# Altium PCB BAILEY.PcbDoc (part 8 of 8)
Units mil, origin at the board's own origin, x right, y up, seen from the top; angles counter-clockwise.
Board outline 4500 x 4000 mil, 4 copper layers (Signal Layer 1, Signal Layer 2, Signal Layer 3, Signal Layer 4), stack 59.904 mil thick; 190 components, 117 nets, 664 pads, 291 vias.
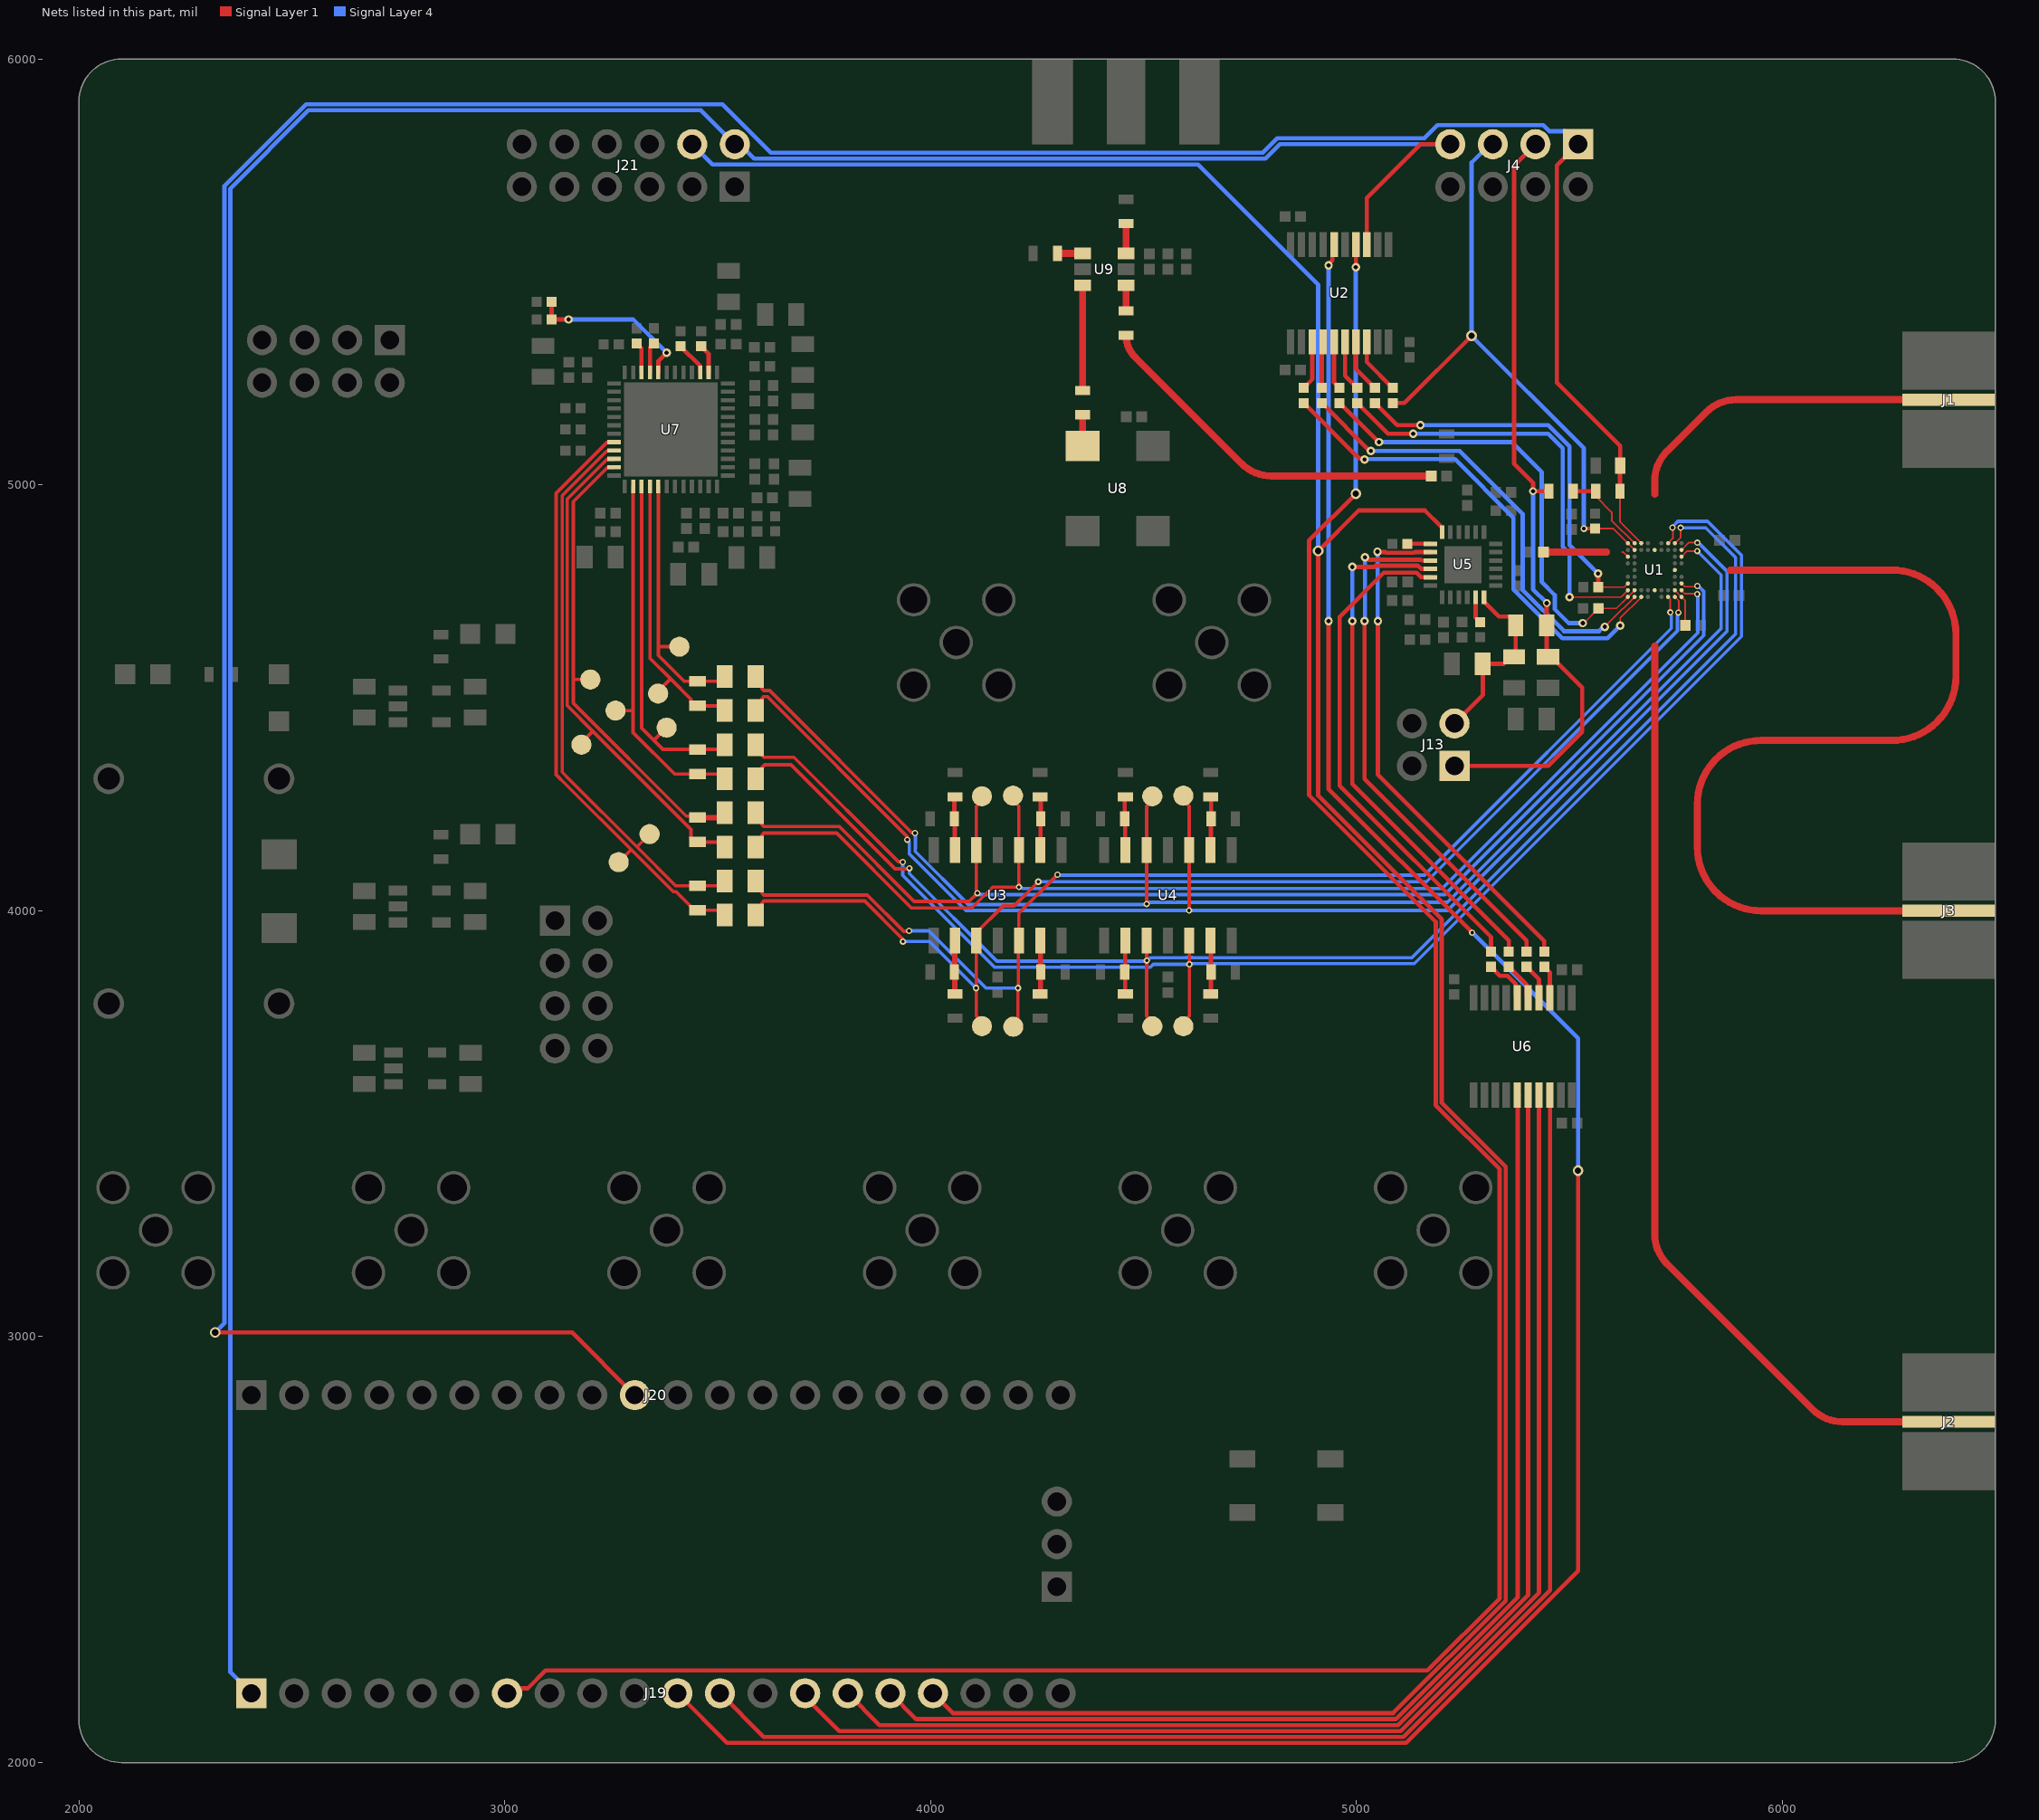
[diagram p5: the nets of this part, all layers, seen from the top]

## Via types
v1: diameter 25, hole 15, Signal Layer 1 to Signal Layer 4, 128 vias
v2: diameter 13.78, hole 7.87, Signal Layer 1 to Signal Layer 4, tented both sides, 41 vias
v3: diameter 20, hole 10, Signal Layer 1 to Signal Layer 4, 39 vias
v4: diameter 15, hole 8, Signal Layer 1 to Signal Layer 4, 27 vias
v5: diameter 16.14, hole 16.14, Signal Layer 1 to Signal Layer 4, 24 vias
v6: diameter 23.62, hole 13.78, Signal Layer 1 to Signal Layer 4, tented both sides, 16 vias
v7: diameter 16, hole 16, Signal Layer 1 to Signal Layer 4, 8 vias
v8: diameter 196.85, hole 125.98, Signal Layer 1 to Signal Layer 4, 4 vias
v9: diameter 18, hole 10, Signal Layer 1 to Signal Layer 4, 2 vias
v10: diameter 11, hole 6, Signal Layer 1 to Signal Layer 4, 1 vias
v11: diameter 16, hole 8, Signal Layer 1 to Signal Layer 4, 1 vias

## Nets (pads, with @x,y where several pads share a name; then routed paths per layer and width w, separated by ;. In a path a pad name is that pad's centre, name@x,y a point inside that pad or via, vN(x,y) a via of type N, cw(c..) or ccw(c..) an arc to the next point about the centre after c; other vN are vias at no path point) (continued)
NetR3_1: R3.1 R4.2 U1.A2 | length 207.7
  Signal Layer 1 w4: R4.2@5561.46,4973.11 5599.18,4935.39 5599.18,4916.57 U1.A2@5652.76,4862.99 ; R4.2@5561.46,4978.11 R4.2@5561.46,4985
  Signal Layer 1 w10: R3.1@5508.54,4985 R4.2@5561.46,4985
NetR5_1: R5.1 U2.3 | length 116.5
  Signal Layer 1 w10: R5.1@4876,5227.59 4896.02,5247.62 U2.3@4896.02,5335.83
NetR6_1: R6.1 U2.4 | length 109.6
  Signal Layer 1 w10: R6.1@4918.41,5227.59 4918.41,5332.62 U2.4@4921.61,5335.83
NetR7_1: R7.1 U2.5 | length 113.5
  Signal Layer 1 w10: U2.5@4947.2,5335.83 4947.2,5240.42 R7.1@4960.03,5227.59
NetR8_1: R8.1 U2.6 | length 120.2
  Signal Layer 1 w10: U2.6@4972.8,5335.83 4972.8,5256.45 R8.1@5001.65,5227.59
NetR9_1: R9.1 U2.7 | length 126.8
  Signal Layer 1 w10: U2.7@4998.39,5335.83 4998.39,5272.48 R9.1@5043.28,5227.59
NetR10_1: R10.1 U2.8 | length 133.5
  Signal Layer 1 w10: U2.8@5023.98,5335.83 5023.98,5288.51 R10.1@5084.9,5227.59
NetR12_1: R12.1 R14.1 U3.2 | length 126.4
  Signal Layer 1 w12.35: R14.1@4057.16,3804.66 4056.43,3805.39 4056.43,3855.39 R12.1@4055.7,3856.12 4056.43,3856.85 4056.43,3929.09 U3.2@4057.16,3929.82
NetR13_1: R13.1 R15.1 U3.13 | length 126.4
  Signal Layer 1 w10: U3.13@4057.16,4142.42 4056.43,4143.15 4056.43,4215.39 R13.1@4055.7,4216.12 4055.7,4266.12 R15.1@4057.16,4267.58
NetR16_1: R16.1 R18.1 U3.6 | length 126.4
  Signal Layer 1 w12.35: R16.1@4257.16,3804.66 4257.89,3805.39 4257.89,3855.39 R18.1@4258.61,3856.12 4257.89,3856.85 4257.89,3929.09 U3.6@4257.16,3929.82
NetR17_1: R17.1 R19.1 U3.9 | length 126.4
  Signal Layer 1 w10: U3.9@4257.16,4142.42 4257.89,4143.15 4257.89,4215.39 R19.1@4258.61,4216.12 4258.61,4266.12 R17.1@4257.16,4267.58
NetR20_1: R20.1 R22.1 U4.2 | length 126.4
  Signal Layer 1 w10: R22.1@4457.16,3804.66 4456.43,3805.39 4456.43,3855.39 R20.1@4455.7,3856.12 4456.43,3856.85 4456.43,3929.09 U4.2@4457.16,3929.82
NetR21_1: R21.1 R23.1 U4.13 | length 126.4
  Signal Layer 1 w10: U4.13@4457.16,4142.42 4456.43,4143.15 4456.43,4215.39 R21.1@4455.7,4216.12 4455.7,4266.12 R23.1@4457.16,4267.58
NetR24_1: R24.1 R26.1 U4.6 | length 126.4
  Signal Layer 1 w10: R24.1@4657.16,3804.66 4657.89,3805.39 4657.89,3855.39 R26.1@4658.61,3856.12 4657.89,3856.85 4657.89,3929.09 U4.6@4657.16,3929.82
NetR25_1: R25.1 R27.1 U4.9 | length 126.4
  Signal Layer 1 w10: U4.9@4657.16,4142.42 4657.89,4143.15 4657.89,4215.39 R27.1@4658.61,4216.12 4658.61,4266.12 R25.1@4657.16,4267.58
NetR28_1: R28.1 U5.13 | length 53.9
  Signal Layer 1 w10: R28.1@5119.43,4861.47 5119.58,4861.61 5173.08,4861.61 U5.13@5173.23,4861.76
NetR30_1: R30.1 U5.23 | length 62.4
  Signal Layer 1 w10: U5.23@5279.53,4735.78 5279.53,4688.19 R30.1@5290,4677.72
NetR33_1: R33.1 U6.3 | length 78
  Signal Layer 1 w10: R33.1@5440.66,3868.35 5453.98,3855.04 U6.3@5453.98,3795.85
NetR34_1: R34.1 U6.4 | length 84.7
  Signal Layer 1 w10: R34.1@5399.04,3868.35 5428.39,3839.01 U6.4@5428.39,3795.85
NetR35_1: R35.1 U6.5 | length 91.3
  Signal Layer 1 w10: R35.1@5357.42,3868.35 5398.94,3826.83 5398.94,3799.71 U6.5@5402.8,3795.85
NetR36_1: R36.1 U6.6 | length 108.3
  Signal Layer 1 w10: R36.1@5315.8,3868.35 5336.75,3847.4 5354.4,3847.4 5373.35,3828.46 5373.35,3799.71 U6.6@5377.2,3795.85
NetR38_1: R38.1 U7.26 | length 69.1
  Signal Layer 1 w10: R38.1@3461.14,5325.61 3478.58,5308.16 U7.26@3478.58,5263.76
NetR39_1: R39.1 U7.27 | length 81.1
  Signal Layer 1 w10: R39.1@3412.37,5325.61 3458.8,5279.18 3458.8,5263.85 U7.27@3458.9,5263.76
NetR40_1: R40.1 U7.34 | length 73.1
  Signal Layer 1 w10: R40.1@3310,5332.28 3321.1,5321.18 U7.34@3321.1,5263.76
NetR45_1: R45.1 R46.1 U7.32 | length 398.4
  Signal Layer 1 w10: R46.1@3110,5430 R45.1@3110,5388.38 v3(3150,5388.38) ; U7.32@3360.47,5263.76 3360.47,5290.47 v3(3380,5310)
  Signal Layer 4 w10: v3(3150,5388.38) 3301.62,5388.38 v3(3380,5310)
NetR47_2: R47.2 U7.33 | length 72.3
  Signal Layer 1 w10: U7.33@3340.79,5263.76 3340.79,5323.07 R47.2@3350,5332.28
NetR49_1: R49.1 U8.3 | length 73.1
  Signal Layer 1 w16.65: U8.3@4356.73,5091.47 R49.1@4356.73,5164.59
NetR49_2: R49.2 U9.3 | length 247.1
  Signal Layer 1 w16.65: R49.2@4356.73,5221.67 U9.3@4356.73,5468.74
NetR50_1: R50.1 U9.4 | length 120.4
  Signal Layer 1 w16.65: R50.1@4458.7,5408.54 U9.4@4458.7,5468.74 R50.1@4458.7,5408.54
NetR51_1: R51.1 U9.1 | length 118.4
  Signal Layer 1 w16.65: R51.1@4297.52,5543.54 U9.1@4356.73,5543.54 R51.1@4297.52,5543.54
NetR52_1: R52.1 U9.6 | length 139.8
  Signal Layer 1 w16.65: U9.6@4458.7,5543.54 R52.1@4458.7,5613.45 U9.6@4458.7,5543.54
PLL_CLK: J19.12 U6.18 | length 3297.4
  Signal Layer 1 w10: J19.12@3505.31,2162.69 3608,2060 5110,2060 5454.17,2404.17 5454.17,3567.23 U6.18@5453.93,3567.46
  Signal Layer 1 w15: U6.18@5453.93,3567.46 U6.18@5453.98,3567.51
PLL_CLK_3: R33.2 U5.14 | length 1227.5
  Signal Layer 1 w10: v3(5049.02,4843.21) 5050.15,4842.08 5067.04,4842.08 5068.46,4840.66 5134.97,4840.66 5136.39,4842.08 U5.14@5173.23,4842.08 ; v3(5050,4680) 5050,4320.11 5440.58,3929.53 5440.58,3903.87 R33.2@5440.66,3903.79
  Signal Layer 4 w10: v3(5049.02,4843.21) 5049.51,4842.71 5049.51,4680.49 v3(5050,4680)
PLL_CP_3: C25.1 J13.2 R31.2 R32.1 U5.24 | length 435.2
  Signal Layer 1 w10: J13.2@5230,4440 5296.42,4506.42 C25.1@5296.42,4580 5345.71,4580 5362.13,4596.42 R32.1@5370,4596.42 5373.58,4600 R31.2@5373.58,4670 5373.58,4677.87 5360.87,4690.59 5334.06,4690.59 5299.21,4725.44 U5.24@5299.21,4735.78
PLL_DATA: J19.14 U6.17 | length 3068.1
  Signal Layer 1 w10: J19.14@3705.31,2162.69 3705.31,2153.93 3785.23,2074 5103.51,2074 5428.39,2398.88 U6.17@5428.39,3567.51
PLL_DATA_3: R34.2 U5.15 | length 1240.4
  Signal Layer 1 w10: v3(5019.02,4679.98) 5019.02,4309.65 5398.91,3929.76 5398.91,3903.92 R34.2@5399.04,3903.79 ; v3(5020,4830) 5022.71,4830 5028.5,4824.21 5150.01,4824.21 5151.41,4822.8 5172.81,4822.8 U5.15@5173.23,4822.39
  Signal Layer 4 w10: v3(5019.02,4679.98) 5020,4680.96 v3(5020,4830)
PLL_LE: J19.15 U6.16 | length 2929.1
  Signal Layer 1 w10: J19.15@3805.31,2162.69 3880,2088 5097.71,2088 5403.03,2393.32 U6.16@5403.03,3567.27
PLL_LE_3: R35.2 U5.16 | length 1243.3
  Signal Layer 1 w10: v3(4990,4680) 4990,4297.54 5357.63,3929.91 5357.63,3904 R35.2@5357.42,3903.79 ; v3(4990.32,4807.34) 5041.55,4807.34 5044.42,4810.21 5144.21,4810.21 5151.3,4803.12 5172.81,4803.12 U5.16@5173.23,4802.71
  Signal Layer 4 w10: v3(4990,4680) 4990.32,4680.32 v3(4990.32,4807.34)
PLL_MUXOUT: J19.16 U6.15 | length 2796.5
  Signal Layer 1 w10: J19.16@3905.31,2162.69 3966,2102 5091.91,2102 5378.56,2388.65 U6.15@5378.56,3566.15
  Signal Layer 1 w15: U6.15@5377.2,3567.51 U6.15@5378.56,3566.15
PLL_MUXOUT_3: R36.2 U5.17 | length 1194.6
  Signal Layer 1 w10: U5.17@5173.23,4783.02 5172.81,4783.43 5151.18,4783.43 5140.61,4794.01 5063.88,4794.01 4960,4690.13 4960,4293.92 5315.83,3938.09 R36.2@5315.8,3903.79
PLL_REFIN: C14.2 R50.2 | length 863.8
  Signal Layer 1 w16.65: R50.2@4458.7,5351.46 ccw(c4531.51,5351.46) 4480.03,5299.97 4729.89,5050.11 ccw(c4800.6,5120.82) 4800.6,5020.82 C14.2@5175.31,5020.82
PLL_TXDATA: J19.17 J21.8 U5.12 | length 6709.6
  Signal Layer 1 w10: J19.17@4005.31,2162.69 4052,2116 5086.11,2116 5350,2379.89 5350,3398.97 5200,3548.97 5200,3980 4910,4270 v1(4910,4844.85) 5005.15,4940 5160.44,4940 5200.79,4899.66 U5.12@5200.79,4889.32
  Signal Layer 4 w10: J21.8@3440,5800 3488,5752 4628,5752 4910,5470 v1(4910,4844.85)
RADAR_BG_1: C4.2 U1.H8 U1.J9 | length 93
  Signal Layer 1 w4: U1.H8@5747.24,4752.76 U1.J9@5762.99,4737.01 5771.89,4728.11 C4.2@5771.89,4670
RADAR_IF1I_4_N: C59.1 C60.2 TP10.1 U7.45 | length 1353.9
  Signal Layer 1 w8: U7.45@3256.24,5080.79 3255.34,5079.88 3239.88,5079.88 3134.78,4974.78 3134.78,4325.22 3151.52,4308.48 3310.08,4149.92 ; TP10.1@3340,4180 3310.08,4150.08 3310.08,4149.92 ; C60.2@3516.25,4070 3505,4058.74 C59.1@3452.67,4058.74 3401.26,4058.74 3310.08,4149.92
RADAR_IF1I_4_P: C58.2 C59.2 TP9.1 U7.44 | length 1419.8
  Signal Layer 1 w8: U7.44@3256.24,5100.47 3255.34,5099.57 3239.57,5099.57 3124.64,4984.64 3124.64,4984.43 3120.78,4980.58 3120.78,4319.42 3145.72,4294.48 3296.63,4143.57 ; TP9.1@3267.4,4114.23 3296.63,4143.46 3296.63,4143.57 ; C58.2@3516.25,3990 3504.99,4001.26 C59.2@3452.67,4001.26 3445.59,4001.26 3402.11,4044.74 3395.46,4044.74 3296.63,4143.57
RADAR_IF1I_N: C60.1 TP2.1 U1.J7 U3.5 | length 2888.4
  Signal Layer 1 w4: U1.J7@5731.5,4737.01 5731.5,4736.71 5736.46,4731.74 5736.46,4700.81 v4(5736.77,4700.51)
  Signal Layer 1 w8: C60.1@3589.09,4070 3589.09,4062.13 3603.79,4047.43 3603.79,4041.69 3608.48,4037 3850.9,4037 3936.28,3951.62 3947.86,3951.62 v4(3949.16,3952.92) ; TP2.1@4193.95,3727.77 4193.95,3738.39 4205.08,3749.52 4205.08,3815.32 4206.12,3816.37 4206.12,3928.78 U3.5@4207.16,3929.82 4207.16,3994.06 v4(4297.94,4084.84)
  Signal Layer 4 w8: v4(3949.16,3952.92) 3995.6,3952.92 4129.96,3818.56 v4(4205.08,3818.56) ; v4(4297.94,4084.84) 4299.28,4083.5 5159.66,4083.5 5739.27,4663.1 5739.27,4693.06 5738.11,4694.22 5738.11,4699.17 v4(5736.77,4700.51)
RADAR_IF1I_P: C58.1 TP1.1 U1.J8 U3.3 | length 2876.7
  Signal Layer 1 w4: U1.J8@5747.24,4737.01 5756.63,4727.62 5756.63,4701.17 v4(5755.77,4700.31)
  Signal Layer 1 w8: C58.1@3589.09,3990 3589.09,3997.87 3603.79,4012.57 3603.79,4018.31 3608.48,4023 3845.11,4023 3930.49,3937.62 3930.59,3937.62 3933.57,3934.64 3933.57,3929.16 v4(3934.91,3927.82) ; TP1.1@4120.37,3729.07 4120.37,3739.69 4107.16,3752.9 U3.3@4107.16,3929.82 4107.16,3948.52 4170.23,4011.6 4196.07,4011.6 v4(4252.67,4068.2)
  Signal Layer 4 w8: v4(3934.91,3927.82) 3997.4,3927.82 v4(4106.67,3818.56) ; v4(4252.67,4068.2) 5164.16,4068.2 5753.27,4657.31 5753.27,4692.86 5754.43,4694.02 5754.43,4698.97 v4(5755.77,4700.31)
RADAR_IF1Q_4_N: C62.1 C63.2 TP12.1 U7.47 | length 1113.5
  Signal Layer 1 w8: 3160.93,4542.99 TP12.1@3201,4542.99 ; U7.47@3256.24,5041.42 3255.34,5040.51 3240.51,5040.51 3160.78,4960.78 3160.78,4800.57 3160.92,4800.43 3160.92,4542.98 3160.92,4487.68 3426.21,4222.4 3449.02,4222.4 C62.1@3452.67,4218.74
  Signal Layer 1 w12.35: C62.1@3452.67,4218.74 3505,4218.74 C63.2@3516.25,4230
RADAR_IF1Q_4_P: C61.2 C62.2 TP11.1 U7.46 | length 1196
  Signal Layer 1 w8: TP11.1@3180,4390 3180,4394.83 3206.89,4421.72 ; U7.46@3256.24,5061.1 3255.34,5060.2 3240.2,5060.2 3146.78,4966.78 3146.78,4481.82 3206.89,4421.72 ; C61.2@3516.25,4150 3504.99,4161.26 C62.2@3452.67,4161.26 3445.59,4161.26 3437.38,4169.46 3437.38,4191.22 3206.89,4421.72
RADAR_IF1Q_N: C63.1 TP4.1 U1.G9 U3.12 | length 2980.2
  Signal Layer 1 w4: U1.G9@5763.11,4768.38 5770.63,4760.87 5798.25,4760.87 v4(5799.94,4762.55)
  Signal Layer 1 w8: C63.1@3589.09,4230 3603.79,4215.3 3603.79,4202.44 3608.48,4197.75 3785.44,4197.75 3961.26,4021.92 4090.15,4021.92 4109.58,4041.35 v4(4109.58,4041.5) ; U3.12@4107.16,4142.42 4107.16,4245.01 4120.37,4258.23 TP4.1@4120.37,4268.84 ; U3.12@4107.16,4142.42 4107.18,4045.79 4109.65,4043.32 v4@4109.65,4041.5
  Signal Layer 4 w8: v4(4109.58,4041.5) 4111.47,4041.5 4114.97,4038 4196.03,4038 5207.09,4038 5815.23,4646.14 5815.23,4749.98 5806.15,4759.06 5805.33,4759.06 5801.83,4762.55 v4(5799.94,4762.55)
RADAR_IF1Q_P: C61.1 TP3.1 U1.H9 U3.10 | length 2928.7
  Signal Layer 1 w4: U1.H9@5762.99,4752.76 5771.3,4744.45 5798.84,4744.45 v4(5799.73,4743.56)
  Signal Layer 1 w8: C61.1@3589.09,4150 3603.79,4164.7 3603.79,4177.56 3608.48,4182.25 3779.02,4182.25 3954.84,4006.42 4096.42,4006.42 4145.28,4055.28 4206.75,4055.28 v4(4207.13,4055.65) ; TP3.1@4193.36,4270.26 4193.36,4259.64 4207.16,4245.84 U3.10@4207.16,4142.42 4207.11,4142.38 v4(4207.13,4055.65)
  Signal Layer 4 w8: v4(4207.13,4055.65) 4208.46,4054.31 4213.41,4054.31 4215.31,4052.42 5201.12,4052.42 5801.23,4652.53 5801.23,4737.11 5801.07,4737.27 5801.07,4742.22 v4(5799.73,4743.56)
RADAR_IF2I_4_N: C65.1 C66.2 TP14.1 U7.3 | length 830.4
  Signal Layer 1 w8: U7.3@3321.1,4996.24 3321.1,4428.9 3349.87,4400.13 ; TP14.1@3380,4430 3350.13,4400.13 3349.87,4400.13 ; C66.2@3516.25,4390 3504.99,4378.74 C65.1@3452.67,4378.74 3371.26,4378.74 3349.87,4400.13
RADAR_IF2I_4_P: C64.2 C65.2 TP13.1 U7.2 | length 879
  Signal Layer 1 w8: TP13.1@3260,4470 3301.24,4470 3301.42,4469.83 ; U7.2@3301.42,4996.24 3301.42,4469.83 ; C64.2@3516.25,4310 3504.99,4321.26 C65.2@3452.67,4321.26 3398.74,4321.26 3301.42,4418.58 3301.42,4469.83
RADAR_IF2I_N: C66.1 TP6.1 U1.A7 U4.5 | length 3518
  Signal Layer 1 w4: U1.A7@5731.5,4862.99 5742.72,4874.22 5742.72,4898.92 v4(5741.97,4899.67)
  Signal Layer 1 w8: C66.1@3589.09,4390 3603.79,4375.3 3603.79,4365.29 3608.48,4360.6 3679.03,4360.6 3924.13,4115.5 3932.82,4115.5 v4(3934.16,4114.16) ; TP6.1@4593.36,3728.85 4593.36,3739.04 4607.48,3753.16 v4(4607.48,3874.5) ; v4@4606.91,3875.07 4607.48,3875.65 4607.32,3875.81 4607.32,3929.66 U4.5@4607.16,3929.82
  Signal Layer 4 w8: v4(3934.16,4114.16) 3934.16,4083.22 4141.56,3875.83 4149.76,3867.62 4516.02,3867.62 4522.9,3874.5 v4(4607.48,3874.5) ; v4@4607.48,3875.65 4607.66,3875.82 5135.62,3875.82 5903.86,4644.06 5903.86,4835 5824.16,4914.7 5754.58,4914.7 5745.5,4905.62 5745.5,4905.09 5741.97,4901.57 v4(5741.97,4899.67)
RADAR_IF2I_P: C64.1 TP5.1 U1.A8 U4.3 | length 3425
  Signal Layer 1 w4: U1.A8@5747.41,4863.16 5761,4876.74 v4(5761,4899.2)
  Signal Layer 1 w8: C64.1@3589.09,4310 3589.09,4317.87 3603.79,4332.57 3603.79,4336.51 3610.28,4343 3671.74,4343 3916.08,4098.66 3948.66,4098.66 v4(3950,4100) ; U4.3@4507.16,3929.82 4507.28,3929.7 v4@4507.28,3883.12 ; v4(4507.41,3883.12) 4507.01,3882.73 4507.01,3752.83 4520.37,3739.47 TP5.1@4520.37,3728.85
  Signal Layer 4 w8: v4(3950,4100) 3950,4087.19 4155.56,3881.62 4500.96,3881.62 4501.12,3881.79 4506.07,3881.79 v4(4507.41,3883.12) 4509.12,3883.12 4515.64,3889.65 4599.99,3889.65 4600.34,3890 4613.9,3890 4614.08,3889.82 5129.82,3889.82 5889.86,4649.86 5889.86,4829.21 5819.86,4899.2 v4(5761,4899.2)
RADAR_IF2Q_4_N: C68.1 C69.2 TP16.1 U7.5 | length 632.2
  Signal Layer 1 w8: U7.5@3360.47,4996.24 3360.47,4620.78 ; TP16.1@3410,4620 3361.26,4620 3360.47,4620.78 ; C69.2@3516.25,4550 3505,4538.74 C68.1@3452.67,4538.74 3421.26,4538.74 3360.47,4599.53 3360.47,4620.78
RADAR_IF2Q_4_P: C67.2 C68.2 TP15.1 U7.4 | length 680.6
  Signal Layer 1 w8: U7.4@3340.79,4996.24 3340.79,4593.14 3389.08,4544.85 ; TP15.1@3360,4510 3360,4515.76 3389.08,4544.85 ; C67.2@3516.25,4470 3504.99,4481.26 C68.2@3452.67,4481.26 3445.59,4481.26 3437.38,4489.46 3437.38,4496.55 3389.08,4544.85
RADAR_IF2Q_N: C69.1 TP8.1 U1.C9 U4.12 | length 3296.2
  Signal Layer 1 w4: U1.C9@5762.99,4831.5 5776.23,4844.73 v4(5799.86,4844.73)
  Signal Layer 1 w8: C69.1@3589.09,4550 3603.79,4535.3 3603.79,4521.69 3608.48,4517 3621.83,4517 3955.07,4183.76 3961.95,4183.76 v4(3963.29,4182.42) ; v4(4506.86,4016.08) 4507.01,4016.23 4507.01,4142.27 U4.12@4507.16,4142.42 4507.16,4245.01 4520.37,4258.23 TP8.1@4520.37,4268.84
  Signal Layer 4 w8: v4(3963.29,4182.42) 3964.05,4181.66 3964.05,4146.29 3963.76,4145.99 3963.76,4139.37 4088.54,4014.58 4500.41,4014.58 4500.57,4014.74 4505.52,4014.74 v4(4506.86,4016.08) 4508.76,4016.08 4512.73,4020.05 5213.23,4020.05 5856,4662.83 5856,4788.59 v4(5799.86,4844.73)
RADAR_IF2Q_P: C67.1 TP7.1 U1.B9 U4.10 | length 3360.9
  Signal Layer 1 w4: U1.B9@5762.99,4847.24 5779.97,4864.22 v4(5800.17,4864.22)
  Signal Layer 1 w8: C67.1@3589.09,4470 3603.79,4484.7 3603.79,4498.31 3608.48,4503 3616.03,4503 3943.91,4175.12 3943.91,4168.24 v4(3945.25,4166.91) ; TP7.1@4593.36,4270.26 4593.36,4259.64 4607.16,4245.84 U4.10@4607.16,4142.42 4606.87,4142.14 4606.87,4000.87 v4(4606.59,4000.58)
  Signal Layer 4 w8: v4(3945.25,4166.91) 3945.25,4165.01 3950.05,4160.21 3950.05,4152.09 3949.76,4151.79 3949.76,4133.57 4082.74,4000.58 v4(4606.59,4000.58) 5213.55,4000.58 5870,4657.03 5870,4796.51 5806.28,4860.23 5806.05,4860.23 5802.06,4864.22 v4(5800.17,4864.22)
RADAR_LO_DIV: C17.2 U1.C1 | length 165.3
  Signal Layer 1 w4.02: 5623.97,4842.07 5626.43,4842.07 5636.74,4831.77 U1.C1@5637.01,4831.77
  Signal Layer 1 w16.65: C17.2@5439.04,4842.07 5587.04,4842.07
RADAR_RX1_1: J2.1 U1.H5 | length 2269.9
  Signal Layer 1 w16.65: 5700,4621.9 5700,3241.43 ccw(c5800,3241.43) 5729.29,3170.71 6070.71,2829.29 ccw(c6141.42,2900) 6141.42,2800 J2.1@6390.94,2800
RADAR_RX2_1: J3.1 U1.E8 | length 2269.9
  Signal Layer 1 w16.65: 5878.1,4800 6257.3,4800 cw(c6257.3,4650) 6407.3,4650 6407.3,4550 cw(c6257.3,4550) 6257.3,4400 5950,4400 ccw(c5950,4250) 5800,4250 5800,4150 ccw(c5950,4150) 5950,4000 J3.1@6390.94,4000
RADAR_SPI_CLK_1: R6.2 U1.J2 | length 1094.6
  Signal Layer 1 w4: v3(5582.63,4666.77) 5597.74,4681.88 5597.74,4682 U1.J2@5652.76,4737.01
  Signal Layer 1 w10: R6.2@4918.41,5192.16 5030.7,5079.87 v3(5033.31,5079.87)
  Signal Layer 4 w10: v3(5033.31,5079.87) 5033.44,5080 5242.23,5080 5390,4932.23 5390,4753.25 5486.82,4656.44 5569.59,4656.44 5579.92,4666.77 v3(5582.63,4666.77)
RADAR_SPI_CS: J19.7 U2.14 | length 5832.6
  Signal Layer 1 w10: J19.7@3005.31,2162.69 3016.95,2174.34 3054.12,2174.34 3095.78,2216.01 5166.32,2216.01 5336,2385.69 5336,3393.17 5186,3543.17 5186,3974.2 4888.5,4271.7 4888.5,4869.34 v1(4998.35,4979.19) ; v3(4998.13,5510.81) 4998.26,5510.95 4998.26,5564.04 U2.14@4998.39,5564.17
  Signal Layer 4 w10: v3(4998.13,5510.81) 4998.13,4979.42 v1(4998.35,4979.19)
RADAR_SPI_CS_1: R1.1 R9.2 U1.G1 | length 929.9
  Signal Layer 1 w4: R1.1@5567.72,4760 5628.5,4760 U1.G1@5637.01,4768.5
  Signal Layer 1 w10: R9.2@5043.28,5192.16 5095.43,5140 v3(5150,5140) ; v3(5567.1,4791.57) 5567.41,4791.27 5567.41,4760.31 R1.1@5567.72,4760
  Signal Layer 4 w10: v3(5150,5140) 5450,5140 5500,5090 5500,4858.68 v3(5567.1,4791.57)
RADAR_SPI_MISO_1: R8.2 U1.H1 | length 1026.1
  Signal Layer 1 w4: v3(5500,4736.63) 5620.88,4736.63 U1.H1@5637.01,4752.76
  Signal Layer 1 w10: R8.2@5001.65,5192.16 5074.01,5119.8 v3(5133.02,5119.8)
  Signal Layer 4 w10: v3(5133.02,5119.8) 5450.4,5119.8 5483.94,5086.26 5483.94,4854.93 5500,4838.88 v3(5500,4736.63)
RADAR_SPI_MOSI_1: R5.2 U1.J3 | length 1171.1
  Signal Layer 1 w4: v3(5619.07,4669.79) 5619.07,4687.57 U1.J3@5668.5,4737.01
  Signal Layer 1 w10: R5.2@4876,5192.16 4992.43,5075.73 5006.75,5061.4 5016.71,5061.4 v3(5018.62,5059.49)
  Signal Layer 4 w10: v3(5018.62,5059.49) 5019.59,5060.46 5231.03,5060.46 5368.54,4922.95 5368.54,4754.91 5483.46,4640 5589.28,4640 v3(5619.07,4669.79)
RADAR_SPI_RST_1_N: C5.2 R7.2 U1.H2 U1.J1 | length 1109.5
  Signal Layer 1 w4: v3(5531.21,4675.44) 5533.55,4675.44 C5.2@5568.11,4710 5610,4710 U1.J1@5637.01,4737.01 U1.H2@5652.76,4752.76
  Signal Layer 1 w10: R7.2@4960.03,5192.16 5051.71,5100.48 v3(5052.74,5100.48)
  Signal Layer 4 w10: v3(5052.74,5100.48) 5364.38,5100.48 5434.84,5030.02 5434.84,4771.81 5465.49,4741.15 5465.49,4708.01 5498.07,4675.44 v3(5531.21,4675.44)
RADAR_SPI_RST_N: J19.11 U2.16 | length 5692.6
  Signal Layer 1 w10: J19.11@3405.31,2162.69 3522,2046 5116,2046 5520,2450 v1(5520,3390) ; v3(4934.16,4680.32) 4934.16,4286.06 v4(5271.46,3948.76) ; v3(4934.16,5515.27) 4934.16,5517.98 4943.35,5527.16 4943.35,5560.31 U2.16@4947.2,5564.17
  Signal Layer 4 w10: v3(4934.16,4680.32) v3(4934.16,5515.27) ; v4(5271.46,3948.76) 5520,3700.22 v1(5520,3390)
RADAR_TX1_1: J1.1 U1.B5 | length 816.4
  Signal Layer 1 w16.65: 5700,4978.1 5700,5008.57 cw(c5800,5008.57) 5729.29,5079.29 5820.71,5170.71 cw(c5891.42,5100) 5891.42,5200 J1.1@6390.94,5200
RADAR_TX1_EN: J4.4 J19.1 J21.7 U2.13 | length 6913.3
  Signal Layer 1 w10: U2.13@5023.98,5564.17 5023.98,5673.98 5150,5800 J4.4@5220,5800
  Signal Layer 4 w10: J19.1@2405.31,2162.69 2355.63,2212.37 2355.63,5695.83 2539.29,5879.49 2634.81,5879.49 3460.51,5879.49 J21.7@3540,5800 3551.32,5800 3585.32,5766 4786,5766 4820,5800 J4.4@5220,5800
RADAR_TX1_EN_1: J4.3 R2.2 R10.2 U1.A1 U1.B2 | length 1427.1
  Signal Layer 1 w4: R2.2@5560,4897.28 5602.72,4897.28 U1.A1@5637.01,4862.99 U1.B2@5652.76,4847.24
  Signal Layer 1 w8: v11(5533.59,4897.28) R2.2@5560,4897.28
  Signal Layer 1 w10: R10.2@5084.9,5192.16 5112.16,5192.16 v1(5270,5350)
  Signal Layer 4 w10: J4.3@5320,5800 5312.99,5800 5270,5757.01 v1(5270,5350) 5533.59,5086.41 v11(5533.59,4897.28)
RADAR_VPTAT: C6.2 J4.1 J20.10 R4.1 U1.A3 | length 8136.8
  Signal Layer 1 w4: R4.1@5618.64,4985 5618.54,4984.9 5618.54,4912.95 U1.A3@5668.5,4862.99
  Signal Layer 1 w10: v1(2320,3010) 3158,3010 J20.10@3305.31,2862.69 ; J4.1@5520,5800 5470.2,5750.2 5470.2,5239.8 5618.74,5091.26 C6.2@5618.74,5045 5618.64,5044.9 R4.1@5618.64,4985
  Signal Layer 4 w10: v1(2320,3010) 2341.63,3031.63 2341.63,5701.63 2533.49,5893.49 3511.37,5893.49 3624.86,5780 4780,5780 4814,5814 5159.47,5814 5189.9,5844.43 5438.4,5844.43 5452.4,5830.43 5489.57,5830.43 J4.1@5520,5800
RADAR_VTUNE: C26.1 J4.2 J13.1 R3.2 R31.1 | length 1841.9
  Signal Layer 1 w10: J13.1@5230,4340 5450,4340 5530,4420 5530,4524.29 5457.87,4596.42 C26.1@5450,4596.42 5446.42,4600 v9(5446.42,4722.29) ; J4.2@5420,5800 5370,5750 5370,5049.27 5414.3,5004.97 v9(5414.3,4985) R3.2@5451.46,4985
  Signal Layer 4 w10: v9(5414.3,4985) 5414.3,4754.41 v9(5446.42,4722.29)
pads on no net: J19.2 J19.19 J19.20 J20.1 J20.2 J20.4 J20.5 J20.6 J20.7 J20.9 J20.12 J20.14 J20.15 J20.20 J22.1 J22.3 U1.B7 U1.E2 U2.1 U2.9 U2.12 U2.20 U5.20 U5.21 U6.1 U6.7 U6.8 U6.9 U6.12 U6.13 U6.14 U6.20 U7.6 U7.7 U7.17 U7.28 U7.29 U7.30 U7.31 U10.4 U11.4 U12.4

## Polygon pours and split planes (outlines as drawn)
NetD1_1 on Signal Layer 1 "NETD1_1_L01_P002" (solid, pour order 2): 2000,4488.32 2550,4488.32 2550,4050 2000,4050
5V_IN on Signal Layer 1 "5V_IN_L01_P003" (solid, pour order 3): 2580,4700 2690.47,4700 2690.47,3530 2580,3530
5V_IN on Signal Layer 1 "5V_IN_L01_P004" (solid, pour order 4): 2333.84,4700 2580,4700 2580,4511.5 2333.84,4511.5
GND on Signal Layer 1 "GND_L01_P005" (solid, pour order 5): 2632.6,3641.81 2957.4,3641.81 2957.4,3530 2632.6,3530
5V_IN on Signal Layer 1 "5V_IN_L01_P006" (solid, pour order 6): 2632.6,3750.03 2790,3750.03 2790,3647.68 2632.6,3647.68
GND on Signal Layer 1 "GND_L01_P008" (solid, pour order 8): 2642.6,4021.81 2967.4,4021.81 2967.4,3910 2642.6,3910
GND on Signal Layer 1 "GND_L01_P011" (solid, pour order 11): 2642.6,4491.81 2967.4,4491.81 2967.4,4380 2642.6,4380
5V_IN on Signal Layer 1 "5V_IN_L01_P012" (solid, pour order 12): 2642.6,4700 2800,4700 2800,4497.68 2642.6,4497.68
3V3 on Signal Layer 1 "3V3_L01_P013" (solid, pour order 13): 2819.68,4600.06 2967.4,4600.06 2967.4,4497.72 2819.68,4497.72
1V5 on Signal Layer 1 "1V5_L01_P007" (solid, pour order 7): 2809.68,3750.06 2957.4,3750.06 2957.4,3647.72 2809.68,3647.72
5V_IN on Signal Layer 1 "5V_IN_L01_P009" (solid, pour order 9): 2642.6,4130.03 2800,4130.03 2800,4027.68 2642.6,4027.68
1V8 on Signal Layer 1 "1V8_L01_P010" (solid, pour order 10): 2819.68,4130.06 2967.4,4130.06 2967.4,4027.72 2819.68,4027.72
1V8 on Signal Layer 3 "1V8_L03_P033" (solid, pour order 33): 3190,3758.15 3800,3758.15 3800,3500 3190,3500
1V8 on Signal Layer 3 "1V8_L03_P031" (solid, pour order 31): 2000,4150 3800,4150 3800,3758.15 2000,3758.15
1V5 on Signal Layer 3 "1V5_L03_P001" (solid, pour order 1): 5500,6000 6500,6000 6500,4650 5500,4650
3V3 on Signal Layer 3 "3V3_L03_P017" (solid, pour order 17): 3850,5450 5450,5450 5450,6000 3850,6000
3V3 on Signal Layer 3 "3V3_L03_P019" (solid, pour order 19): 3850,5150 4700,5150 4700,5450 3850,5450
1V5 on Signal Layer 3 "1V5_L03_P016" (solid, pour order 16): 4750,5200 5500,5200 5500,5400 4750,5400
3V3 on Signal Layer 3 "3V3_L03_P022" (solid, pour order 22): 5189.45,4050 5483.94,4050 5483.94,5179.34 5189.45,5179.34
1V8 on Signal Layer 3 "1V8_L03_P023" (solid, pour order 23): 5529.76,3700 5177.8,3700 5177.8,4000 5529.76,4000
3V3 on Signal Layer 3 "3V3_L03_P024" (solid, pour order 24): 5200,3050 5950,3050 5950,3650 5200,3650
1V5 on Signal Layer 3 "1V5_L03_P025" (solid, pour order 25): 2000,3021.49 6500,3021.49 6500,2000 2000,2000
3V3 on Signal Layer 3 "3V3_L03_P026" (solid, pour order 26): 5483.94,4050 5950,4050 5950,4600 5483.94,4600
3V3 on Signal Layer 3 "3V3_L03_P027" (solid, pour order 27): 5583.94,3650 5950,3650 5950,4050 5583.94,4050
1V5 on Signal Layer 3 "1V5_L03_P028" (solid, pour order 28): 6000,4650 6500,4650 6500,2000 6000,2000
3V3 on Signal Layer 3 "3V3_L03_P030" (solid, pour order 30): 4850,4940.97 5189.45,4940.97 5189.45,5179.34 4850,5179.34
1V8 on Signal Layer 3 "1V8_L03_P032" (solid, pour order 32): 3190,3500 5177.8,3500 5177.8,3050 3190,3050
3V3 on Signal Layer 3 "3V3_L03_P020" (solid, pour order 20): 2000,4200 3850,4200 3850,6000 2000,6000
1V8 on Signal Layer 3 "1V8_L03_P021" (solid, pour order 21): 4900,3500 5177.8,3500 5177.8,4925.07 4900,4925.07
3V3 on Signal Layer 3 "3V3_L03_P018" (solid, pour order 18): 3850,3550 4850,3550 4850,5179.08 3850,5179.08
1V5 on Signal Layer 3 "1V5_L03_P029" (solid, pour order 29): 2000,3750 3165.38,3750 3165.38,3021.49 2000,3021.49
GND on Signal Layer 4 "GND_L04_P000" (solid, pour order 0): 2000,6000 6500,6000 6500,2000 2000,2000
GND on Signal Layer 2 "GND_L02_P015" (solid, pour order 15): 2000,6000 6500,6000 6500,2000 2000,2000

## Other copper
Signal Layer 1:
  region net ADC_MCLKIN: 3539.8,5085.69 3539.8,5075.88 3565.82,5072.46 3565.82,5089.11
  region net NetC15_1: 5254.43,4905.06 5265.25,4905.06 5268.17,4931.09 5251.52,4931.09
  region net RADAR_LO_DIV: 5587.46,4850.4 5587.46,4833.75 5625.49,4840.16 5625.49,4843.98
  region net NetC17_1: 5342.52,4847.49 5342.52,4836.66 5368.54,4833.75 5368.54,4850.4
  region net RADAR_RX2_1: 5878.1,4793.9 5878.1,4806.1 5805.1,4806.1 5805.1,4793.9
  region net RADAR_RX1_1: 5689.8,4693.66 5689.8,4696.36 5696.06,4722.3 5703.93,4722.3 5710.19,4696.36 5710.19,4693.66
  region net RADAR_TX1_1: 5706.1,4978.1 5693.89,4978.1 5693.89,4905.1 5706.1,4905.1
  region net RADAR_TX1_1: 5710.19,4906.34 5710.19,4903.64 5703.93,4877.7 5696.06,4877.7 5689.8,4903.64 5689.8,4906.34
  region net RADAR_TX1_1: 5696.06,4879.1 5703.93,4879.1 5703.93,4849.99 5696.06,4849.99
  region net RADAR_RX2_1: 5806.34,4789.8 5803.63,4789.8 5777.7,4796.06 5777.7,4803.94 5803.63,4810.2 5806.34,4810.2
  region net RADAR_RX1_1: 5693.89,4621.9 5706.1,4621.9 5706.1,4694.9 5693.89,4694.9
  region net RADAR_RX2_1: 5779.1,4803.94 5779.1,4796.06 5749.99,4796.06 5749.99,4803.94
  region net RADAR_RX1_1: 5703.93,4720.9 5696.06,4720.9 5696.06,4750.01 5703.93,4750.01

## Silkscreen, mask and mechanical layers (free items; w line width, h text height)
Top Overlay:
  drawing of 48 lines, arcs and shapes, not listed
  text "TX1_EN" at 5215,5953.33 h25
  text "GND" at 3154.12,5866.5 h25 r90
  text "TX1_EN" at 3551.06,5867.32 h25 r90
  text "3V3" at 3053.39,5866.12 h25 r90
  text "CONV / START" at 3380,5864.67 h25 r90
  text "3V3" at 5235,5865 h25 r90
  text "1V5" at 5335,5865 h25 r90
  text "VTUNE" at 5435,5865 h25 r90
  text "VPTAT" at 5535,5865 h25 r90
  text "DATA / READY" at 3279.09,5864.08 h25 r90
  text "PLL / TXD" at 3476.73,5864.44 h25 r90
  text "REF" at 4758,5842 h60 r90
  text "PMOD" at 2966.96,5659.67 h50 r90
  text "RADAR" at 5150,5640 h50 r90
  text "DOUT0" at 3509.91,5610.69 h25
  text "GND" at 5337.85,5605 h25
  text "3V3" at 3050.2,5568.38 h25 r90
  text "GND" at 3151.63,5567.76 h25 r90
  text "SCLK" at 3283.67,5550.45 h25 r90
  text "DOUT1" at 3392.62,5537.38 h25 r90
  text "FS_ADC" at 3327.85,5505.66 h25 r90
  text "DATA_READY" at 2440.35,5406.26 h25 r90
  text "RST_N" at 2540.35,5406.26 h25 r90
  text "FAULT_N" at 2640.35,5406.26 h25 r90
  text "CONV_START_N" at 2740.35,5406.26 h25 r90
  text "ADC" at 2360,5225.71 h50 r90
  text "GND" at 2547.85,5144.37 h25
  text "TX" at 6402,4962 h60
  text "50 MHz" at 4291.28,4891.41 h40 r90
  text "+3V3" at 2618,4628 h40
  text "N" at 3569.96,4600.39 h40 r90
  text "IF2Q" at 3748.19,4458 h40 r90
  text "+5V" at 2062,4422 h60
  text "IF1Q_P" at 3908,4421.33 h40
  text "IF2Q_N" at 4508,4421.33 h40
  text "GND" at 5064.6,4360.07 h25 r90
  text "IF1Q" at 4108,4351.81 h40
  text "IF2Q" at 4508,4351.81 h40
  text "PLL_CP" at 5316.67,4345 h25 r90
  text "IF2I" at 3752,4304.26 h40 r90
  text "VTUNE" at 5185,4255 h25
  text "PLL" at 5133.49,4174.06 h50
  text "+1V8" at 2618,4158 h40
  text "IF1Q" at 3748.19,4152.01 h40 r90
  text "P" at 3908,4028 h40
  text "N" at 4764.97,4023.48 h40
  text "IF1I" at 3752,3998.59 h40 r90
  text "5V" at 3054.35,3956.97 h25 r90
  text "P" at 3572,3908 h40 r90
  text "GND" at 2064,3894 h60
  text "3V3" at 3053.43,3850.26 h25 r90
  text "GND" at 3305,3795 h25 r90
  text "+1V5" at 2618,3768 h40
  text "RX2" at 6342,3762 h60
  text "1V8" at 3053.43,3751.05 h25 r90
  text "1V5" at 3053.79,3648.95 h25 r90
  text "IF1I" at 4121.57,3606.5 h40
  text "IF2I" at 4524.26,3603.82 h40
  text "POWER" at 3055.86,3553 h50
  text "IF1Q_N" at 2028,3041.33 h40
  text "IF1I_P" at 2628,3041.33 h40
  text "IF1I_N" at 3228,3041.33 h40
  text "IF2I_P" at 3828,3041.33 h40
  text "IF2I_N" at 4428,3041.33 h40
  text "IF2Q_P" at 5028,3041.33 h40
  text "RX1" at 6362,2562 h60
  text "RESET" at 4785,2515 h25
  text "BAILEY" at 4600,2320 h100
  text "24 GHz Radar Master Board" at 4580,2152.89 h40
  text "Rev. 1" at 4588,2085.89 h40
Top Solder:
  region: 3188.61,5745.85 3188.61,5240.24 3592.74,5240.24 3592.74,5745.85
  region: 5600,6000 5600,2000 6500,2000 6500,6000
  lines w16.65: 3240,5700 3240,5437.72 3310,5367.72 ; 3340,5700 3346.51,5693.49 3346.51,5371.2 3350,5367.72 ; 3412.37,5361.04 3412.37,5657.7 3440,5685.33 3440,5700 ; 3461.14,5361.04 3461.14,5621.14 3540,5700 ; 5211.53,5062.25 5211.53,5062.25 ; 5211.53,5062.25 5211.53,5020.82 cw(c5211.53,4983.68) 5237.79,5009.94 ; 5237.79,5009.94 5259.84,4987.89 5237.79,5009.94
  lines w80: 3523.76,5080.79 3999.83,5080.79 ccw(c4000,5183.78) 4102.99,5183.78 4102.99,5439.29 ; 4204.78,5543.54 4207.25,5543.54 ; 4356.73,5056.03 4356.73,5468.74 ; 4356.73,5543.54 4207.25,5543.54 ; 4458.7,5900 4458.7,5351.46 ccw(c4531.51,5351.46) 4480.03,5299.97 4729.89,5050.11 ccw(c4800.6,5120.82) 4800.6,5020.82 5211.53,5020.82 cw(c5211.53,4983.68) 5237.79,5009.94 5259.84,4987.89 5259.84,4889.32 ; 5326.77,4842.07 5623.97,4842.07 ; 4102.99,5439.29 cw(c4207.25,5439.29) 4207.25,5543.54 ; 4102.99,5439.29 4102.99,5439.29
Mechanical 1:
  the board outline again, w10
Mechanical 3:
  circle w0.5: c5676.62,4718.9 r3.94
  circle w0.5: c5730.33,4807.87 r3.94
  circle w0.5: c5670.15,4807.87 r3.94
  circle w0.5: c5692.37,4769.91 r3.94
  circle w0.5: c5619.14,4776.38 r3.94
  circle w0.5: c5781.34,4776.38 r3.94
  circle w0.5: c5723.86,4881.1 r3.94
  circle w0.5: c5670.15,4792.13 r3.94
  circle w0.5: c5619.14,4776.38 r3.94
  circle w0.5: c5781.34,4823.62 r3.94
  circle w0.5: c5676.62,4881.1 r3.94
  circle w0.5: c5723.86,4718.9 r3.94
  circle w0.5: c5619.14,4823.62 r3.94
  circle w0.5: c5708.11,4830.09 r3.94
  circle w0.5: c5708.11,4769.91 r3.94
  circle w0.5: c5730.33,4792.13 r3.94
  circle w0.5: c5692.37,4830.09 r3.94
Mechanical 13:
  lines w3.94: 2266.53,2332.69 2266.53,2392.69 2266.53,2692.69 2294.95,2692.69 2294.95,2926.47 4358.96,2926.47 4358.96,2099.7 2294.95,2099.7 2294.95,2332.69 2266.53,2332.69
Mechanical 15:
  lines w1.97: 3346.84,2512.69 3386.21,2512.69 ; 3366.53,2493.01 3366.53,2532.38 ; 2266.53,2032.69 2266.53,2992.69 4426.53,2992.69 4426.53,2032.69 2266.53,2032.69

## Text inside footprints (layer, text, board x,y; h text height)
U5: Top Overlay "*" at 5289.21,4941.82 h50 r270; Mechanical 13 "*" at 5292.71,4885.57 h25 r270; Mechanical 13 "RefDes2" at 5225,4900.05 h50 r270
U7: Top Overlay "*" at 3296.89,4942.7 h50 r90; Mechanical 13 "*" at 3296.89,4999.78 h50 r90